# Altium PCB PCB1.PcbDoc (part 3 of 3)
Units mm, origin at the board's own origin, x right, y up, seen from the top; angles counter-clockwise.
Board outline 77.5 x 89.25 mm, 4 copper layers (Top Layer, Layer 1, Layer 2, Bottom Layer), stack 0.603 mm thick; 122 components, 112 nets, 561 pads, 302 vias.
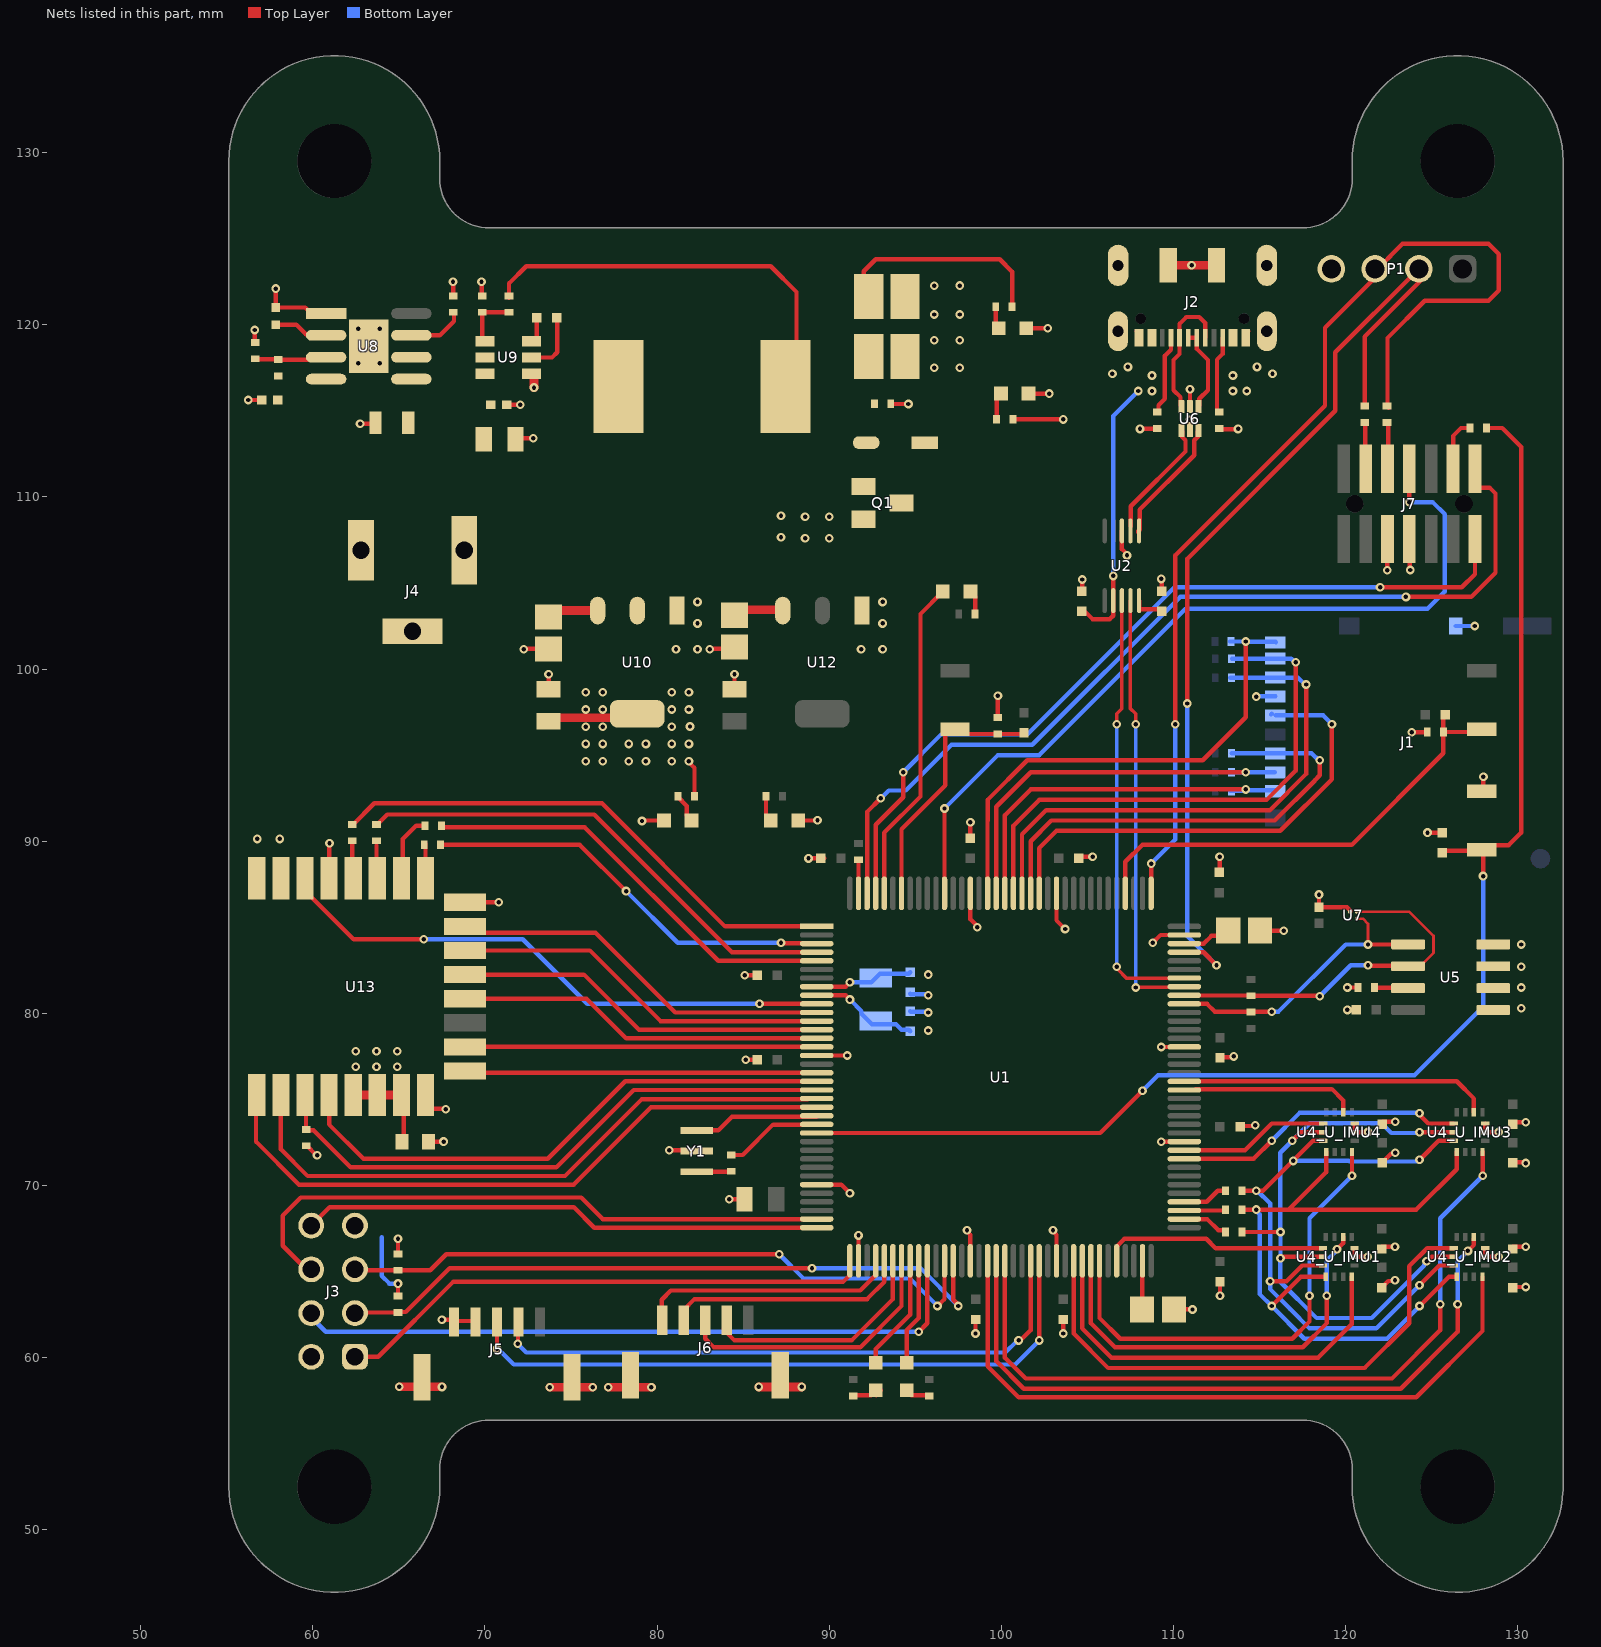
[diagram p4: the nets of this part, all layers, seen from the top]

## Via types
v1: diameter 0.508, hole 0.254, Top Layer to Bottom Layer, tented both sides, 302 vias

## Nets (pads, with @x,y where several pads share a name; then routed paths per layer and width w, separated by ;. In a path a pad name is that pad's centre, name@x,y a point inside that pad or via, vN(x,y) a via of type N, cw(c..) or ccw(c..) an arc to the next point about the centre after c; other vN are vias at no path point) (continued)
3V3_Wireless: C33.1 C42.1 J3.7 R21.1 R22.1 R30.2 R40.1 U10.2 U10.4 U13.5 U13.6 U13.7 | length 18.3
  Top Layer w0.254: R30.2@59.61,72.308 59.66,72.308 60.218,71.75 v1(60.25,71.75) ; R22.1@64.95,63.575 v1(64.95,64.3) ; R21.1@64.95,66.025 v1(64.95,66.9) ; U13.7@65.15,75.255 65.29,75.115 C33.1@65.29,72.55 ; U10.4@78.85,97.163 U10.4@78.85,97.4 ; v1(81.85,94.65) 81.85,94.581 82.175,94.256 R40.1@82.175,92.6
  Top Layer w0.5: U13.5@62.35,75.255 U13.6@63.75,75.255 U13.7@65.15,75.255 ; C42.1@74.35,97.163 U10.4@78.85,97.163
  Bottom Layer w0.254: 64,67 64,64.75 64.45,64.3 v1(64.95,64.3)
  other v1: 62.5,76.9 63.7,76.9 64.9,76.9 62.5,77.8 63.7,77.8 64.9,77.8 75.85,94.65 76.85,94.65 78.35,94.65 79.35,94.65 80.85,94.65 75.85,95.65 76.85,95.65 78.35,95.65 79.35,95.65 80.85,95.65 81.85,95.65 75.85,96.65 76.85,96.65 80.85,96.65 81.912,96.663 75.85,97.65 76.85,97.65 80.85,97.65 81.85,97.65 75.85,98.65 76.85,98.65 80.85,98.65 81.85,98.65
5V: C31.1 C41.1 D6.1 Q1.3 U10.3 U12.3 | length 4.5
  Top Layer w0.254: C41.1@74.35,103.4 C41.1@74.35,103.451
  Top Layer w0.5: C41.1@74.35,103.4 U10.3@76.55,103.4 ; C31.1@85.1,103.451 87.249,103.451 U12.3@87.3,103.4
5V_BUCK: C39.1 C40.1 D6.2 L1.2 Q1.1 R26.2 R28.2 R37.1 | length 37
  Top Layer w0.254: R26.2@71.4,121.577 71.4,122.4 72.4,123.4 86.6,123.4 88.1,121.9 88.1,117.05 L1.2@87.45,116.4 ; C40.1@92.05,121.65 92.005,121.695 92.005,123.105 92.7,123.8 99.9,123.8 100.625,123.075 R37.1@100.625,121.05
5V_USB: C22.1 J2.2 J2.11 Q1.2 R38.1 U2.7 U6.5 | length 19.6
  Top Layer w0.254: R38.1@100.675,114.5 v1(103.6,114.5) ; C22.1@104.677,103.474 104.717,103.474 105.291,102.9 106.3,102.9 106.5,103.1 U2.7@106.5,103.975 v1@106.5,105.4 ; U6.5@110.95,115.34 110.954,115.344 110.954,116.246 v1(110.958,116.25)
  Bottom Layer w0.254: v1(106.497,105.411) 106.497,114.697 v1(107.95,116.15)
  other v1: 88.6,107.6 90,107.6 87.2,107.655 88.6,108.845 90,108.845 87.2,108.9 108.75,116.15 113.45,116.15 114.25,116.15 108.75,117.05 113.45,117.05
+BATT: C35.1 J4.1 R23.2 U8.4
+BATT_PROTECT: C34.1 C37.1 C38.1 U8.5 U9.2 U9.3 | length 0
  Top Layer w0.254: U8.5@65.727,116.845 U8.5@65.742,116.83
BMI_CS1: U1.68 U4_U_IMU1.12 | length 13.2
  Top Layer w0.254: U1.68@106.7,65.625 106.7,66.454 107.146,66.9 111.9,66.9 112.444,66.356 U4_U_IMU1.12@118.686,66.356
BMI_CS2: U1.63 U4_U_IMU2.12 | length 32
  Top Layer w0.254: U1.63@104.2,65.625 104.2,61.4 106.2,59.4 121.1,59.4 123.7,62 123.7,65.318 124.737,66.356 U4_U_IMU2.12@126.286,66.356
BMI_CS3: U1.81 U4_U_IMU3.12 | length 17
  Top Layer w0.254: U1.81@110.625,71.55 114.65,71.55 v1(115.7,72.6) ; v1@124.2,74.2 124.8,73.6 U4_U_IMU3.12@126.286,73.6
  Bottom Layer w0.254: v1(115.7,72.6) 117.316,74.216 124.184,74.216 v1@124.2,74.2
  other v1: 124.291,74.2
BMI_CS4: U1.82 U4_U_IMU4.12 | length 8.7
  Top Layer w0.254: U1.82@110.625,72.05 114.15,72.05 115.7,73.6 U4_U_IMU4.12@118.7,73.6
BMI_INT11: U1.64 U4_U_IMU1.4 | length 23.8
  Top Layer w0.254: U1.64@104.7,65.625 104.7,61.7 106.4,60 118.4,60 120.35,61.95 U4_U_IMU1.4@120.35,64.7
BMI_INT12: U1.53 U4_U_IMU2.4 | length 40.4
  Top Layer w0.254: U1.53@99.2,65.625 99.2,59.5 101,57.7 124.1,57.7 127.95,61.55 U4_U_IMU2.4@127.95,64.7
BMI_INT13: U1.55 U4_U_IMU3.4 | length 44
  Top Layer w0.254: U1.55@100.2,65.625 100.2,60.004 101.412,58.792 122.692,58.792 125.5,61.6 v1@125.5,63.2 ; v1(127.969,70.571) U4_U_IMU3.4@127.969,71.951
  Bottom Layer w0.254: v1@125.5,63.2 125.5,68.102 v1(127.969,70.571)
  other v1: 125.5,63.1
BMI_INT14: U1.66 U4_U_IMU4.4 | length 27.3
  Top Layer w0.254: U1.66@105.7,65.625 105.7,62.3 106.9,61.1 116.9,61.1 117.9,62.1 v1(117.9,63.6) ; v1(120.364,70.564) U4_U_IMU4.4@120.364,71.944
  Bottom Layer w0.254: v1(117.9,63.6) 117.9,68.1 v1(120.364,70.564)
BMI_INT21: U1.65 U4_U_IMU1.9 | length 23.9
  Top Layer w0.254: U1.65@105.2,65.625 105.2,62 106.6,60.6 117.5,60.6 118.909,62.009 118.909,63.591 v1(118.9,63.6) ; v1(119.5,66.3) 119.85,66.65 U4_U_IMU1.9@119.85,67.011
  Bottom Layer w0.254: v1(118.9,63.6) 118.9,65.631 119.5,66.231 v1(119.5,66.3)
BMI_INT22: U1.54 U4_U_IMU2.9 | length 40.5
  Top Layer w0.254: U1.54@99.7,65.625 99.7,59.8 101.3,58.2 123.2,58.2 126.5,61.5 v1(126.5,63.1) ; v1(127.1,66.2) 127.45,66.55 U4_U_IMU2.9@127.45,66.911
  Bottom Layer w0.254: v1(126.5,63.1) 126.5,65.6 v1(127.1,66.2)
BMI_INT23: U1.90 U4_U_IMU3.9 | length 18
  Top Layer w0.254: U1.90@110.625,76.05 126.45,76.05 127.45,75.05 U4_U_IMU3.9@127.45,74.256
BMI_INT24: U1.89 U4_U_IMU4.9 | length 9.5
  Top Layer w0.254: U1.89@111.3,75.6 119.2,75.6 119.864,74.936 U4_U_IMU4.9@119.864,74.256
BMI_MISO: R34.1 U4_U_IMU1.1 U4_U_IMU2.1 U4_U_IMU3.1 U4_U_IMU4.1 | length 41.5
  Top Layer w0.254: R34.1@113.975,68.6 v1(114.8,68.6) 116.7,68.6 ; v1(115.7,63) 117.4,64.7 U4_U_IMU1.1@118.85,64.7 ; U4_U_IMU4.1@118.864,71.944 118.864,70.764 116.7,68.6 ; v1@124.3,63 126,64.7 U4_U_IMU2.1@126.45,64.7 ; U4_U_IMU3.1@126.45,71.944 126.45,70.95 124.1,68.6 116.7,68.6
  Bottom Layer w0.254: v1(114.8,68.6) 114.8,68.531 115,68.331 115,63.7 v1(115.7,63) 117.6,61.1 122.4,61.1 v1@124.3,63
  other v1: 124.291,63
BMI_MOSI: R35.1 U4_U_IMU1.14 U4_U_IMU2.14 U4_U_IMU3.14 U4_U_IMU4.14 | length 38.2
  Top Layer w0.254: R35.1@113.975,69.7 115.2,69.7 118.1,72.6 U4_U_IMU4.14@118.7,72.6 ; v1(115.61,64.434) 116.562,64.434 117.484,65.356 U4_U_IMU1.14@118.686,65.356 ; v1(124.291,64.209) 125.437,65.356 U4_U_IMU2.14@126.286,65.356 ; v1@124.443,71.643 125.4,72.6 U4_U_IMU3.14@126.286,72.6
  Bottom Layer w0.254: v1(114.8,69.7) 114.869,69.7 115.614,68.954 115.614,64.438 v1(115.61,64.434) 115.61,63.99 116.781,62.819 117.9,61.7 121.782,61.7 v1(124.291,64.209) ; v1(116.956,71.429) 120.173,71.429 120.21,71.392 124.114,71.392 124.222,71.5 v1(124.291,71.5)
BMI_SCK: R29.1 U4_U_IMU1.13 U4_U_IMU2.13 U4_U_IMU3.13 U4_U_IMU4.13 | length 37.8
  Top Layer w0.254: R29.1@113.975,67.3 v1(116.211,67.3) ; v1(116.211,65.775) 116.28,65.775 116.36,65.856 U4_U_IMU1.13@118.686,65.856 ; v1(116.9,72.6) 117.4,73.1 U4_U_IMU4.13@118.7,73.1 ; v1@124.2,73.1 U4_U_IMU3.13@126.286,73.1 ; v1(124.7,65.6) 124.72,65.6 124.976,65.856 U4_U_IMU2.13@126.286,65.856
  Bottom Layer w0.254: v1@116.2,67.3 116.2,71.9 v1(116.9,72.6) 117.916,73.616 122.084,73.616 122.649,73.051 124.173,73.051 124.2,73.078 v1@124.2,73.1 ; v1(116.211,67.3) v1(116.211,65.775) 116.2,65.764 116.2,64.414 118.31,62.304 121.512,62.304 124.573,65.365 124.573,65.404 124.7,65.531 v1(124.7,65.6)
  other v1: 124.291,73.1
BOOT0: C18.1 R5.2 SW3.1 U1.138 | length 15
  Top Layer w0.254: U1.138@94.2,86.975 94.2,90.7 96.75,93.25 96.75,96.227 97.023,96.5 SW3.1@97.3,96.5 97.573,96.227 C18.1@101.2,96.227
BUCK_SW: C36.2 L1.1 U9.5 | length 3.6
  Top Layer w0.254: U9.5@72.7,118.1 73.9,118.1 74.2,118.4 C36.2@74.2,120.421
CC1: J2.3 R16.1 | length 4.5
  Top Layer w0.254: R16.1@112.65,114.925 112.6,114.925 112.527,114.998 112.527,117.977 112.85,118.3 J2.3@112.85,119.25
CC2: J2.9 R15.1 | length 4.7
  Top Layer w0.254: R15.1@109.05,114.925 109.055,114.925 109.128,114.998 109.128,115.328 109.5,115.7 109.5,118.2 109.85,118.55 J2.9@109.85,119.25
dVdt: C30.1 U8.2 | length 3.3
  Top Layer w0.254: C30.1@57.749,120 59.05,120 59.595,119.455 60.703,119.455 U8.2@60.773,119.385
DWM_CS: R1.1 U1.3 | length 24
  Top Layer w0.254: 67.675,89.8 75.5,89.8 v1(78.2,87.1) ; v1(87.2,84.1) 87.239,84.061 89.259,84.061 U1.3@89.271,84.05 ; U1.3@89.526,84.054 U1.3@89.53,84.05
  Bottom Layer w0.254: v1(78.2,87.1) 81.2,84.1 v1(87.2,84.1)
DWM_EXTON: U1.22 U13.1 | length 38.2
  Top Layer w0.254: U13.1@56.75,75.255 56.7,75.205 56.7,72.55 59.2,70.05 75.15,70.05 79.65,74.55 U1.22@89.275,74.55
DWM_IRQ: U1.10 U13.22 | length 33.4
  Top Layer w0.254: U13.22@59.55,87.845 59.55,87.12 62.37,84.3 v1(66.45,84.3) ; v1(85.95,80.558) 85.954,80.554 89.526,80.554 U1.10@89.53,80.55
  Bottom Layer w0.254: v1(66.45,84.3) 72.2,84.3 75.942,80.558 v1(85.95,80.558)
DWM_MISO: R32.1 U1.4 | length 28.7
  Top Layer w0.254: R32.1@63.7,90.975 63.75,90.975 64.325,91.55 76.35,91.55 84.35,83.55 U1.4@88.8,83.55
DWM_MOSI: R33.1 U1.5 | length 24.4
  Top Layer w0.254: R33.1@67.475,90.8 75.8,90.8 83.55,83.05 U1.5@88.7,83.05
DWM_nRST: R30.1 U1.20 U13.3 | length 34
  Top Layer w0.254: U13.3@59.55,75.255 59.61,75.195 R30.1@59.61,73.258 59.66,73.209 60.041,73.209 62.2,71.05 74.15,71.05 78.65,75.55 U1.20@88.8,75.55
DWM_RXLED: U1.13 U13.13 | length 21.3
  Top Layer w0.254: U13.13@68.845,82.25 75.75,82.25 78.95,79.05 U1.13@88.8,79.05
DWM_RXOKLED: U1.11 U13.15 | length 21.9
  Top Layer w0.254: U13.15@68.845,85.05 69.218,84.677 76.423,84.677 81.05,80.05 U1.11@88.7,80.05
DWM_SCK: R31.1 U1.1 | length 30.4
  Top Layer w0.254: R31.1@62.3,90.975 62.35,90.975 63.575,92.2 76.8,92.2 83.95,85.05 U1.1@89.275,85.05
DWM_SFDLED: U1.12 U13.14 | length 21.7
  Top Layer w0.254: U13.14@68.845,83.65 76.1,83.65 80.2,79.55 U1.12@88.8,79.55
DWM_SPIPHA: U1.18 U13.9 | length 20
  Top Layer w0.254: U13.9@68.845,76.65 68.945,76.55 U1.18@88.8,76.55
DWM_SPIPOL: U1.15 U13.10 | length 20.4
  Top Layer w0.254: U13.10@68.845,78.05 U1.15@89.275,78.05
DWM_SYNC: U1.19 U13.4 | length 32.7
  Top Layer w0.254: U13.4@60.95,75.255 60.95,73.55 62.95,71.55 73.65,71.55 78.15,76.05 U1.19@89.275,76.05
DWM_TXLED: U1.14 U13.12 | length 21
  Top Layer w0.254: U13.12@68.845,80.85 75.9,80.85 78.2,78.55 U1.14@88.9,78.55
DWM_WAKEUP: U1.21 U13.2 | length 36.2
  Top Layer w0.254: U13.2@58.15,75.255 58.15,72.1 59.7,70.55 74.65,70.55 79.1,75 U1.21@88.743,75
EEPROM_SCL: R7.2 U1.100 U5.6 U7.A2 | length 21.6
  Top Layer w0.152: U7.A2@120.65,85.9 123.7,85.9 125.1,84.5 125.1,83.51 124.325,82.735 U5.6@123.625,82.735
  Top Layer w0.254: U1.100@110.625,81.05 110.637,81.039 114.5,81.039 114.526,81.012 118.487,81.012 v1(118.5,81) ; v1(121.3,82.8) 121.333,82.767 123.593,82.767 U5.6@123.625,82.735
  Bottom Layer w0.254: v1(118.5,81) 120.3,82.8 v1(121.3,82.8)
EEPROM_SDA: R8.2 U1.99 U5.5 U7.B2 | length 16.8
  Top Layer w0.152: U7.B2@120.65,85.5 121,85.5 121.3,85.2 v1(121.3,84)
  Top Layer w0.254: U1.99@110.625,80.55 111.95,80.55 112.4,80.1 R8.2@114.5,80.1 ; R8.2@114.5,80.075 114.512,80.088 115.688,80.088 v1(115.7,80.1) ; v1(121.3,84) 121.303,84.002 123.623,84.002 U5.5@123.625,84.005
  Bottom Layer w0.254: v1(115.7,80.1) 116.1,80.1 120,84 v1(121.3,84)
EN: R23.1 R25.2 U8.3 | length 4.1
  Top Layer w0.254: R25.2@56.75,118.025 56.775,118 58.025,118 58.05,117.975 59.668,117.975 59.808,118.115 U8.3@60.773,118.115
ESP_CH_PD: J3.3 R22.2 U1.49 | length 39.8
  Top Layer w0.254: J3.3@62.45,62.557 J3.3@63.1,62.557 ; J3.3@63.1,62.625 63.2,62.625 R22.2@64.95,62.625 64.978,62.653 65.403,62.653 67.95,65.2 v1(89,65.2) ; U1.49@97.2,65.625 97.2,63.369 97.5,63.069 v1(97.5,63)
  Bottom Layer w0.254: v1(89,65.2) 95.3,65.2 v1(97.5,63)
ESP_IO0: J3.6 U1.35 | length 36
  Top Layer w0.254: J3.6@59.91,65.13 59.62,65.13 58.25,66.5 58.25,68.25 59.3,69.3 75.6,69.3 76.85,68.05 U1.35@89.275,68.05
ESP_IO2: J3.4 U1.46 | length 40.2
  Top Layer w0.254: v1(95.208,61.5) 95.7,61.992 U1.46@95.7,65.625
  Bottom Layer w0.254: J3.4@59.73,62.52 60.75,61.5 v1(95.208,61.5)
ESP_nRST: J3.5 R21.2 U1.48 | length 38.3
  Top Layer w0.254: J3.5@62.45,65.103 63.173,65.103 63.2,65.075 R21.2@64.95,65.075 66.825,65.075 67.75,66 v1(87.1,66) ; v1@96.3,63 96.7,63.4 U1.48@96.7,65.625
  Bottom Layer w0.254: v1(87.1,66) 88.5,64.6 94.688,64.6 v1(96.286,63.002)
ESP_RXD: J3.8 U1.36 | length 30.6
  Top Layer w0.254: J3.8@59.698,67.458 60.987,68.747 75.153,68.747 76.35,67.55 U1.36@89.275,67.55
ESP_TXD: J3.1 U1.37 | length 31.5
  Top Layer w0.254: J3.1@62.45,60.05 63.8,60.05 68.15,64.4 90.8,64.4 91.2,64.8 U1.37@91.2,65.625
EXT_CS: J6.1 U1.40 | length 15.2
  Top Layer w0.254: J6.1@80.453,62.378 80.3,62.225 80.268,62.257 80.268,63.368 80.8,63.9 91.735,63.9 ; 91.805,63.9 92.7,64.795 U1.40@92.7,65.625
EXT_MISO: J6.4 U1.42 | length 13.3
  Top Layer w0.254: J6.4@83.858,61.642 84.5,61 91.3,61 93.7,63.4 U1.42@93.7,65.625
EXT_MOSI: J6.3 U1.43 | length 16.4
  Top Layer w0.254: J6.3@82.8,62.225 82.8,61.1 83.304,60.596 91.796,60.596 94.2,63 U1.43@94.2,65.625
EXT_RX: J5.3 U1.59 | length 38.7
  Top Layer w0.254: v1(70.7,60.5) J5.3@70.7,62.125 ; v1(102.2,61) U1.59@102.2,65.625
  Bottom Layer w0.254: v1(70.7,60.5) 70.769,60.5 71.669,59.6 100.8,59.6 v1(102.2,61)
EXT_SCK: J6.2 U1.41 | length 14.1
  Top Layer w0.254: J6.2@81.55,62.225 81.55,62.775 82.175,63.4 92.2,63.4 93.2,64.4 U1.41@93.2,65.625
EXT_TX: J5.4 U1.58 | length 36
  Top Layer w0.254: v1(71.9,60.8) 71.925,60.825 71.925,62.1 J5.4@71.95,62.125 ; v1@101,60.9 101.7,61.6 U1.58@101.7,65.625
  Bottom Layer w0.254: v1(71.9,60.8) 72.4,60.3 100.231,60.3 100.931,61 v1(101,61)
FB: R26.1 R27.1 U9.1 | length 2.9
  Top Layer w0.254: R27.1@69.85,120.6 69.85,119.2 U9.1@70,119.05 ; R27.1@69.85,120.725 71.106,120.725
GND: C1.2 C2.2 C3.2 C4.2 C5.2 C6.2 C7.2 C8.2 C9.2 C10.2 C11.2 C12.2 C13.2 C14.2 C15.2 C16.1 C19.1 C20.2 C21.2 C22.2 C27_U_IMU1.2 C27_U_IMU2.2 C27_U_IMU3.2 C27_U_IMU4.2 C28_U_IMU1.2 C28_U_IMU2.2 C28_U_IMU3.2 C28_U_IMU4.2 C29.2 C30.2 C31.2 C32.2 C33.2 C34.2 C35.2 C37.2 C38.2 C39.2 C40.2 C41.2 C42.2 D2.1 D3.1 D4.1 D5.1 J1.6 J1.10 J2.1 J2.12 J2.S1 J2.S2 J2.S3 J2.S4 J2.S5 J2.S6 J3.2 J4.2 J4.3 J5.1 J5.2 J5.6 J5.7 J6.6 J6.7 J7.5 J7.7 P1.4 R4.1 R5.1 R14.2 R15.2 R16.2 R24.1 R25.1 R27.2 R28.1 SW1.2 U1.16 U1.31 U1.38 U1.51 U1.61 U1.83 U1.94 U1.107 U1.120 U1.130 U2.3 U4_U_IMU1.6 U4_U_IMU1.7 U4_U_IMU2.6 U4_U_IMU2.7 U4_U_IMU3.6 U4_U_IMU3.7 U4_U_IMU4.6 U4_U_IMU4.7 U5.1 U5.2 U5.3 U5.4 U6.2 U7.A1 U8.1 U8.9 U9.4 U10.1 U12.1 U13.8 U13.16 U13.21 U13.23 U13.24 Y1.2 | length 107.5
  Top Layer w0.254: v1(56.25,115.63) C35.2@57.04,115.63 ; R25.1@56.623,118.919 v1(56.623,119.694) ; C30.2@57.85,120.96 v1(57.85,122.1) ; C30.2@57.85,121 59.563,121 59.908,120.655 U8.1@60.773,120.655 ; U13.21@60.95,87.845 v1@60.95,89.9 ; v1(62.75,114.25) 63.595,114.25 C34.2@63.647,114.302 ; U13.8@66.55,75.255 66.55,74.823 66.923,74.45 v1@67.7,74.45 ; C33.2@66.61,72.55 v1(67.6,72.55) ; v1(67.5,62.2) 68.125,62.2 68.2,62.125 J5.2@69.45,62.125 ; 68.147,122.199 68.157,122.189 ; R24.1@68.157,121.637 v1@68.157,122.489 ; U13.16@68.845,86.45 v1(70.8,86.45) ; R27.2@69.825,121.65 v1@69.825,122.475 ; C38.2@71.51,115.35 v1(72.05,115.35) ; C37.2@71.56,113.4 v1(72.8,113.4) ; C37.2@71.71,113.85 C37.2@71.76,113.9 ; v1@72.226,101.174 C41.2@73.7,101.174 ; C42.2@73.7,98.825 v1(73.7,99.7) ; v1@79.1,91.2 D5.1@80.4,91.2 ; v1(80.7,72.05) 82.25,72.05 Y1.2@82.3,72 ; v1@83.026,101.174 C31.2@84.5,101.174 ; v1(84.2,69.2) C1.2@84.736,69.2 ; C32.2@84.5,98.825 v1(84.5,99.7) ; v1@85.104,82.204 C8.2@85.812,82.204 ; v1(85.15,77.3) C9.2@85.816,77.3 ; C8.2@85.9,82.308 C8.2@85.904,82.304 ; D4.1@88.2,91.2 v1@89.3,91.2 ; v1(88.8,89) C7.2@89.716,89 ; U1.16@89.53,77.55 v1(91.05,77.55) ; U1.31@89.752,70.052 90.698,70.052 v1(91.2,69.55) ; U1.38@91.7,65.625 v1(91.7,67.1) ; R28.1@93.575,115.4 v1@94.35,115.4 ; v1(98,67.4) 98,67.331 98.2,67.131 U1.51@98.2,65.625 ; U1.130@98.2,86.933 98.2,85.469 98.6,85.069 v1(98.6,85) ; C6.2@98.2,90.284 v1(98.2,91.1) ; v1(98.5,61.4) C12.2@98.5,62.216 ; R5.1@99.8,97.175 99.8,97.6 v1@99.8,98.2 ; D2.1@101.45,119.8 v1(102.7,119.8) ; D3.1@101.575,116 v1(102.775,116) ; v1(103,67.4) 103,67.331 103.2,67.131 U1.61@103.2,65.625 ; U1.120@103.2,86.956 103.2,85.4 v1(103.7,84.9) ; v1(103.6,61.4) C11.2@103.6,62.216 ; C5.2@104.342,88.964 104.342,89.094 C5.2@104.348,89.1 ; C5.2@104.648,89.1 v1(105.3,89.1) ; C22.2@104.688,104.406 104.688,105.188 v1(104.7,105.2) ; J2.S4@106.78,119.625 J2.S4@106.782,119.623 ; U2.3@107,108.025 107.002,108.023 107.002,106.967 107.3,106.669 v1(107.3,106.6) ; J2.12@107.867,119.623 108,119.49 J2.12@108,119.25 ; v1(108.05,113.95) 108.063,113.962 109.038,113.962 R15.2@109.05,113.975 ; v1(108.8,84.1) 109.25,84.55 U1.107@110.625,84.55 ; v1(109.283,72.549) U1.83@110.803,72.549 ; v1(109.283,78.043) U1.94@110.803,78.043 ; C21.2@109.284,104.441 109.309,104.466 109.309,105.218 v1(109.292,105.235) ; C13.2@110.308,62.808 v1@111.092,62.808 ; U6.2@110.95,113.86 v1(110.95,114.484) ; C4.2@112.675,88.209 v1(112.675,89.1) ; v1@112.698,63.546 C10.2@112.698,64.462 ; R16.2@112.763,113.937 v1@113.738,113.937 ; C3.2@112.816,77.44 112.834,77.458 113.458,77.458 v1(113.5,77.5) ; C2.2@114.084,73.458 114.708,73.458 v1(114.75,73.5) ; J2.1@114.2,119.25 114.2,119.49 J2.1@114.333,119.623 ; J2.S3@115.418,119.623 J2.S3@115.42,119.625 ; C14.2@115.526,84.4 115.526,84.724 115.602,84.8 v1(116.4,84.8) ; v1(118.45,86.9) 118.45,86.16 120.076,86.16 U7.A1@120.293,85.943 ; v1(120.1,80.2) C20.2@120.74,80.2 ; v1(120.1,81.5) R14.2@120.725,81.5 ; U4_U_IMU1.7@120.514,66.356 U4_U_IMU1.6@120.514,65.856 121.278,65.856 v1(121.286,65.864) ; U4_U_IMU4.7@120.529,73.6 U4_U_IMU4.6@120.529,73.1 121.292,73.1 v1(121.3,73.108) ; C27_U_IMU1.2@122.02,66.356 122.1,66.436 v1(122.866,66.436) ; C28_U_IMU1.2@122.061,63.933 122.061,64.033 122.48,64.451 122.851,64.451 v1@122.9,64.5 ; C28_U_IMU4.2@122.114,71.316 122.65,71.851 v1@122.88,71.851 ; C27_U_IMU4.2@122.114,73.68 122.128,73.694 122.866,73.694 v1(122.88,73.708) ; v1(122.415,105.745) 122.423,105.753 122.423,107.542 J7.5@122.415,107.55 ; J7.7@123.7,107.565 123.725,107.54 123.725,105.775 v1(123.75,105.75) ; v1(123.835,96.335) R4.1@124.713,96.335 ; v1(124.75,90.5) 124.758,90.492 125.472,90.492 125.549,90.416 C15.2@125.549,90.409 ; SW1.2@128,92.9 v1(128,93.75) ; U4_U_IMU2.7@128.115,66.356 U4_U_IMU2.6@128.115,65.856 128.878,65.856 v1(128.886,65.864) ; U4_U_IMU3.7@128.115,73.6 U4_U_IMU3.6@128.115,73.1 128.878,73.1 v1(128.886,73.108) ; C27_U_IMU2.2@129.62,66.356 129.7,66.436 v1(130.466,66.436) ; C27_U_IMU3.2@129.62,73.6 129.7,73.68 v1(130.466,73.68) ; C28_U_IMU2.2@129.915,64.1 v1@130.5,64.1 ; 129.992,71.349 130.451,71.349 v1@130.5,71.3
  Top Layer w0.508: v1(65.023,58.304) v1@67.523,58.304 ; U9.4@72.7,117.15 72.804,117.15 72.85,117.104 v1(72.85,116.35) ; v1(73.77,58.275) v1(76.27,58.275) ; v1(77.17,58.275) v1(79.67,58.275) ; v1(85.9,58.3) v1(88.4,58.3) ; J2.S2@109.7,123.45 v1(111.05,123.45) J2.S1@112.5,123.45
  Bottom Layer w0.254: C19.1@94.697,80.131 94.735,80.092 95.658,80.092 v1@95.7,80.05 ; C16.1@94.697,81.131 94.729,81.099 95.651,81.099 v1@95.7,81.05 ; v1(114.8,98.4) 114.813,98.413 115.912,98.413 J1.6@115.925,98.425 ; J1.10@126.4,102.5 v1(127.5,102.5)
  other v1: 67.51,58.3 111.1,62.8 112.7,63.6 130.466,64.1 122.866,64.5 130.466,71.3 122.88,71.9 67.72,74.434 95.75,79 95.75,80.05 130.2,80.3 95.75,81.05 130.2,81.5 85.1,82.208 95.75,82.25 130.2,82.7 130.2,84 60.97,89.884 56.776,90.132 58.076,90.132 79.124,91.176 89.32,91.215 99.8,98.447 72.259,101.149 81.1,101.15 82.35,101.15 83.059,101.149 91.85,101.15 93.1,101.15 82.35,102.65 93.1,102.65 82.35,103.9 93.1,103.9 113.75,113.95 94.6,115.4 106.45,117.15 115.75,117.15 96.1,117.5 97.581,117.503 107.35,117.55 114.85,117.55 62.641,117.764 63.891,117.764 96.1,119.094 97.581,119.097 62.641,119.764 63.891,119.764 96.1,120.594 97.581,120.597 96.1,122.27 97.581,122.273 68.147,122.499 69.8,122.5
ILM: R24.2 U8.7 | length 3.3
  Top Layer w0.254: U8.7@65.727,119.385 67.385,119.385 68.2,120.2 R24.2@68.2,120.713
LED_Blue1: D1.1 U1.44 | length 6.8
  Top Layer w0.254: D1.1@92.7,59.7 92.7,60.5 94.7,62.5 U1.44@94.7,65.625
LED_Blue2: D7.1 U1.45 | length 6.2
  Top Layer w0.254: D7.1@94.5,59.7 94.5,61.6 95.2,62.3 U1.45@95.2,65.625
LED_Blue3: D8.1 U1.140 | length 18.9
  Top Layer w0.254: U1.140@93.2,86.975 93.2,90.5 95.3,92.6 95.3,103.2 D8.1@96.6,104.5
NetC21_1: C21.1 U2.10 | length 1.8
  Top Layer w0.254: U2.10@108,103.975 108,103.476 108.002,103.474 C21.1@109.327,103.474
NetC36_1: C36.1 U9.6 | length 1.7
  Top Layer w0.254: U9.6@72.7,119.05 73.016,119.05 C36.1@73.016,120.4
NetD1_2: D1.2 R36.1 | length 1.4
  Top Layer w0.254: R36.1@91.4,57.825 D1.2@92.425,57.825 ; D1.2@92.725,57.825 D1.2@93,58.1
NetD2_2: D2.2 R37.2 | length 1.3
  Top Layer w0.254: R37.2@99.675,121.05 99.675,119.975 D2.2@99.85,119.8
NetD3_2: D3.2 R38.2 | length 1.6
  Top Layer w0.254: R38.2@99.725,114.5 99.725,115.75 D3.2@99.975,116
NetD4_2: D4.2 R39.2 | length 1.5
  Top Layer w0.254: R39.2@86.325,92.6 86.325,91.475 D4.2@86.6,91.2
NetD5_2: D5.2 R40.2 | length 1.7
  Top Layer w0.254: R40.2@81.225,92.6 81.225,92.55 81.727,92.048 81.727,91.473 D5.2@82,91.2
NetD7_2: D7.2 R20.1 | length 1.4
  Top Layer w0.254: D7.2@94.5,58.1 94.775,57.825 R20.1@95.8,57.825
NetD8_2: D8.2 R41.1 | length 1.4
  Top Layer w0.254: D8.2@98.2,104.5 98.475,104.225 R41.1@98.475,103.2
NetJ2_5: J2.5 J2.8 U6.6 | length 7.8
  Top Layer w0.254: U6.6@110.45,115.24 110.402,115.288 110.402,115.798 110,116.2 110,117.95 110.35,118.3 J2.8@110.35,119.25 110.35,120.05 110.75,120.45 111.5,120.45 111.85,120.1 J2.5@111.85,119.25
NetJ2_6: J2.6 J2.7 U6.4 | length 5
  Top Layer w0.254: J2.7@110.85,119.25 J2.6@111.35,119.25 111.358,119.242 111.358,118.592 112,117.95 112,116.2 111.498,115.698 111.498,115.288 U6.4@111.45,115.24
NetJ7_4: J7.4 R17.1 | length 2.7
  Top Layer w0.254: R17.1@121.1,114.325 121.13,114.295 121.13,111.665 J7.4@121.16,111.635
NetJ7_6: J7.6 R18.1 | length 2.6
  Top Layer w0.254: J7.6@122.43,111.635 122.465,111.67 122.465,114.19 R18.1@122.5,114.225
NetJ7_12: J7.12 R19.1 | length 3.1
  Top Layer w0.254: J7.12@126.24,111.635 126.24,113.54 126.7,114 R19.1@127.225,114
NetR1_2: R1.2 U13.17 | length 2
  Top Layer w0.254: R1.2@66.548,89.883 66.548,89.677 66.55,89.675 U13.17@66.55,87.845
NetR2_2: R2.2 U1.143 | length 1.9
  Top Layer w0.254: U1.143@91.7,86.975 91.7,88.55 R2.2@91.7,88.925
NetR3_1: R3.1 Y1.1 | length 2
  Top Layer w0.254: Y1.1@82.3,70.8 R3.1@84.3,70.8
NetR14_1: R14.1 U5.7 | length 2
  Top Layer w0.254: R14.1@121.693,81.482 U5.7@123.608,81.482 ; 122.475,81.5 122.493,81.482 ; U5.7@124.408,81.482 U5.7@124.425,81.465
NetR29_2: R29.2 U1.74 | length 2.7
  Top Layer w0.254: U1.74@110.625,68.05 111.95,68.05 112.593,67.407 113.018,67.407 R29.2@113.025,67.4
NetR31_2: R31.2 U13.20 | length 2
  Top Layer w0.254: R31.2@62.3,89.825 62.3,87.895 U13.20@62.35,87.845
NetR32_2: R32.2 U13.19 | length 1.9
  Top Layer w0.254: 63.7,89.763 63.7,87.895 U13.19@63.75,87.845
NetR33_2: R33.2 U13.18 | length 3.9
  Top Layer w0.254: U13.18@65.15,87.845 65.225,87.92 65.225,90.125 66,90.9 R33.2@66.525,90.9
NetR34_2: R34.2 U1.75 | length 2.4
  Top Layer w0.254: U1.75@110.625,68.55 R34.2@113.012,68.55
NetR35_2: R35.2 U1.76 | length 2.7
  Top Layer w0.254: U1.76@110.625,69.05 111.925,69.05 112.575,69.7 R35.2@113.025,69.7
nFLT: U8.6
nRST: C15.1 R19.2 SW1.1 U1.25 | length 80.8
  Top Layer w0.254: U1.25@89.275,73.05 105.75,73.05 v1(108.2,75.5) ; C15.1@125.5,89.44 127.94,89.44 128.273,89.773 129.473,89.773 130.2,90.5 130.2,112.9 129.1,114 R19.2@128.175,114 ; v1@128,88 SW1.1@128,89.44
  Bottom Layer w0.254: v1(108.2,75.5) 109.1,76.4 124,76.4 127.982,80.382 v1(127.982,87.974)
OSC32_IN: C16.2 U1.8 Y2.2 | length 5.5
  Top Layer w0.254: U1.8@89.53,81.55 90.95,81.55 v1(91.2,81.8)
  Bottom Layer w0.254: v1@91.216,81.8 92.45,81.8 92.952,82.302 94.617,82.302 C16.2@94.7,82.384
OSC32_OUT: C19.2 U1.9 Y2.1 | length 6.1
  Top Layer w0.254: U1.9@89.53,81.05 90.95,81.05 v1(91.2,80.8)
  Bottom Layer w0.254: v1(91.2,80.8) 91.877,80.123 91.877,79.973 92.482,79.368 93.882,79.368 94.202,79.048 94.617,79.048 C19.2@94.7,78.966
OSC_IN: U1.23 Y1.3 | length 7.6
  Top Layer w0.254: Y1.3@82.3,73.2 83.55,73.2 84.35,74 U1.23@89.275,74 ; U1.23@89.275,74.05 U1.23@89.53,74.05
OSC_OUT: R3.2 U1.24 | length 6
  Top Layer w0.254: R3.2@84.3,71.775 84.975,71.775 86.739,73.539 89.519,73.539 U1.24@89.53,73.55
SD_CD: J1.9 R6.1 U1.128 | length 29.5
  Top Layer w0.254: 99.196,91.2 99.196,86.979 U1.128@99.2,86.975 ; 99.2,91.2 99.2,92.4 101.5,94.7 111.7,94.7 114.2,97.2 v1(114.2,101.6)
  Bottom Layer w0.254: R6.1@113.28,101.6 v1(114.2,101.6) 114.225,101.575 115.925,101.575 J1.9@115.952,101.548
SD_CLK: J1.5 U1.122 | length 28
  Top Layer w0.254: U1.122@102.2,86.975 102.2,89.6 103.2,90.6 116.2,90.6 119.2,93.6 v1(119.2,96.8)
  Bottom Layer w0.254: J1.5@115.662,97.363 J1.5@115.7,97.4 ; J1.5@115.938,97.313 118.687,97.313 v1(119.2,96.8)
SD_CMD: J1.3 R9.1 U1.123 | length 27.6
  Top Layer w0.254: U1.123@101.7,86.975 101.7,90 102.9,91.2 115.883,91.2 118.2,93.517 118.2,93.532 118.5,93.832 v1(118.5,94.7)
  Bottom Layer w0.254: R9.1@113.375,95.112 115.912,95.112 115.925,95.125 115.938,95.113 118.019,95.113 118.431,94.7 v1(118.5,94.7)
SD_D0: J1.7 R10.1 U1.124 | length 31.1
  Top Layer w0.254: U1.124@101.2,86.975 101.2,90.4 102.6,91.8 115.6,91.8 117.7,93.9 v1(117.7,99.1)
  Bottom Layer w0.254: R10.1@113.3,99.5 R10.1@113.375,99.5 J1.7@115.887,99.5 ; J1.7@115.9,99.5 117.231,99.5 117.631,99.1 v1(117.7,99.1)
SD_D1: J1.8 R11.1 U1.125 | length 31.7
  Top Layer w0.254: U1.125@100.7,86.975 100.7,90.9 102.2,92.4 115.4,92.4 117.1,94.1 v1(117.1,100.4)
  Bottom Layer w0.254: R11.1@113.4,100.6 116.834,100.6 117.034,100.4 v1(117.1,100.4)
SD_D2: J1.1 R12.1 U1.126 | length 21.8
  Top Layer w0.254: U1.126@100.2,86.975 100.204,86.979 100.204,89.052 100.208,89.056 ; 100.2,89.052 100.2,91.5 101.708,93.008 v1(114.2,93.008)
  Bottom Layer w0.254: R12.1@113.302,92.913 114.036,92.913 114.131,93.008 v1(114.2,93.008) ; v1@114.2,93 114.238,92.963 J1.1@115.923,92.963
SD_D3: J1.2 R13.1 U1.127 | length 22.9
  Top Layer w0.254: U1.127@99.7,86.975 99.7,92 101.7,94 v1(114.2,94)
  Bottom Layer w0.254: R13.1@113.302,94 v1(114.2,94) 114.213,94.013 J1.2@115.873,94.013
SW: C17.2 R4.2 SW2.2 U1.112 | length 27.4
  Top Layer w0.254: U1.112@107.2,86.975 107.2,88.8 108.2,89.8 120.362,89.8 125.675,95.113 R4.2@125.675,96.346 ; C17.2@125.675,97.331 125.675,96.5 R4.2@125.675,96.346 ; SW2.2@127.9,96.5 127.746,96.346 R4.2@125.675,96.346
SWCLK: P1.3 R18.2 U1.109 | length 63.4
  Top Layer w0.254: U1.109@108.7,86.975 v1(108.7,88.7) ; v1(110.1,96.8) 110.1,106.6 118.8,115.3 118.8,119.82 122.23,123.25 122.23,123.614 122.621,124.005 122.621,124.021 123.3,124.7 128.3,124.7 128.9,124.1 128.9,122 128.3,121.4 124.6,121.4 122.43,119.23 122.43,115.245 R18.2@122.5,115.175
  Bottom Layer w0.254: v1(108.7,88.7) 110.1,90.1 v1(110.1,96.8)
SWDIO: P1.2 R17.2 U1.105 | length 58.9
  Top Layer w0.254: U1.105@110.625,83.55 111.75,83.55 v1(112.5,82.8) ; v1(110.8,98) 110.8,106.4 119.4,115 119.4,118.4 123.992,122.992 124.512,122.992 124.77,123.25 124.77,122.97 121.1,119.3 R17.2@121.1,115.275
  Bottom Layer w0.254: v1(110.8,98) 110.8,84.5 v1(112.5,82.8)
SWO: J7.8 U1.133 | length 47.4
  Top Layer w0.254: U1.133@96.7,87.5 v1(96.7,91.9) ; v1(123.7,109.7) J7.8@123.7,111.635
  Bottom Layer w0.254: v1(96.7,91.9) 99.8,95 102.2,95 110.7,103.5 124.75,103.5 125.75,104.5 125.75,109 125.05,109.7 v1(123.7,109.7)
T_VCP_RX: J7.13 U1.141 | length 47.7
  Top Layer w0.254: U1.141@92.7,86.975 92.7,90.95 94.3,92.55 v1(94.3,94) ; v1(122,104.75) 126.75,104.75 127.51,105.51 J7.13@127.51,107.565
  Bottom Layer w0.254: v1(94.3,94) 96.5,96.2 101.5,96.2 110.058,104.758 121.992,104.758 v1(122,104.75)
T_VCP_TX: J7.14 U1.142 | length 53
  Top Layer w0.254: U1.142@92.2,86.975 92.2,91.7 v1(93,92.5) ; v1(123.5,104.192) 127.292,104.192 128.7,105.6 128.7,110.2 128.377,110.523 127.778,110.523 J7.14@127.51,110.792
  Bottom Layer w0.254: v1(93,92.5) 93.009,92.5 93.454,92.944 94.444,92.944 97.1,95.6 101.8,95.6 110.392,104.192 v1(123.5,104.192)
USART1_RX: U1.102 U2.8 | length 25.7
  Top Layer w0.203: v1(106.7,82.7) 106.7,82.618 107.046,82.272 107.046,82.254 107.25,82.05 U1.102@110.625,82.05 ; v1(106.7,96.8) 106.7,97.4 107,97.7 U2.8@107,103.975
  Bottom Layer w0.203: v1(106.7,82.7) v1(106.7,96.8)
USART1_TX: U1.101 U2.9 | length 25.4
  Top Layer w0.203: U2.9@107.5,103.975 107.5,97.7 107.8,97.4 v1(107.8,96.8) ; v1(107.8,81.5) 107.829,81.529 110.605,81.529 U1.101@110.625,81.55
  Bottom Layer w0.203: v1(107.8,81.5) v1(107.8,96.8)
USB_N: U2.2 U6.1 | length 7
  Top Layer w0.254: U2.2@107.522,108.3 107.522,109.46 110.696,112.634 110.696,113.285 110.498,113.483 110.498,113.812 U6.1@110.45,113.86
USB_P: U2.1 U6.3 | length 7.4
  Top Layer w0.254: U2.1@107.959,107.941 107.959,108.019 108.03,108.09 108.03,109.249 111.204,112.423 111.204,113.285 111.402,113.483 111.402,113.812 U6.3@111.45,113.86
VCAP_1: C13.1 U1.71 | length 2.2
  Top Layer w0.254: C13.1@108.184,63.4 108.192,63.408 108.192,65.617 U1.71@108.2,65.625
VCAP_2: C14.1 U1.106 | length 2.9
  Top Layer w0.254: U1.106@110.625,84.05 111.75,84.05 112.2,84.5 112.874,84.5 C14.1@113.174,84.8
pads on no net: J1.11 J1.12 J1.13 J1.14 J2. J2.4 J2.10 J7. J7.1 J7.2 J7.9 J7.10 J7.11 U1.2 U1.7 U1.26 U1.27 U1.28 U1.29 U1.34 U1.47 U1.50 U1.56 U1.57 U1.60 U1.67 U1.69 U1.70 U1.73 U1.77 U1.78 U1.79 U1.80 U1.85 U1.86 U1.87 U1.88 U1.91 U1.92 U1.93 U1.96 U1.97 U1.98 U1.103 U1.104 U1.110 U1.111 U1.113 U1.114 U1.115 U1.116 U1.117 U1.118 U1.119 U1.129 U1.132 U1.134 U1.135 U1.136 U1.137 U1.139 U2.4 U2.5 U2.6 U4_U_IMU1.2 U4_U_IMU1.3 U4_U_IMU1.10 U4_U_IMU1.11 U4_U_IMU2.2 U4_U_IMU2.3 U4_U_IMU2.10 U4_U_IMU2.11 U4_U_IMU3.2 U4_U_IMU3.3 U4_U_IMU3.10 U4_U_IMU3.11 U4_U_IMU4.2 U4_U_IMU4.3 U4_U_IMU4.10 U4_U_IMU4.11 U8.8 U13.11

## Polygon pours and split planes (outlines as drawn)
GND on Bottom Layer "NONET_L-01_P-001" (solid, pour order 56): 128.5,103.6 128.8,103.3 128.8,102.3 128.5,102 125.6,102 125.3,102.3 125.3,103.3 125.6,103.6
5V_USB on Bottom Layer "5V_USB_L04_P017" (solid, pour order 17): 108.65,117.5 113.75,117.5 114.95,116.3 114.95,115 114.45,114.5 106.25,114.5 98.95,107.2 86.5,107.2 86.2,107.5 86.2,109.35 86.45,109.6 98.2,109.6 104.6,116 107.15,116
GND on Bottom Layer "GND_L04_P050" (solid, pour order 50): 96,83.25 96.5,82.75 96.5,78.75 96,78.25 90.25,78.25 89.75,78.75 89.75,82.75 90.25,83.25
3V3 on Bottom Layer "3V3_L04_P051" (solid, pour order 51): 87.75,100.25 128.25,100.25 129.75,98.75 129.75,60.25 127.75,58.25 75.5,58.25 73.5,60.25 73.5,66.75 85.75,79 85.75,98.25
3V3_Wireless on Bottom Layer "3V3_WIRELESS_L04_P049" (solid, pour order 49): 72.8,99.1 82.7,99.1 83.1,98.7 83.1,94.1 82.6,93.6 74.2,93.6 65.4,84.8 65.4,66.8 65,66.4 60,66.4 59.6,66.8 59.6,85.9
GND on Top Layer "NONET_L-01_P-001" (solid, pour order 55): 65.996,75.517 69.296,75.517 69.496,75.317 69.496,74.117 69.296,73.917 65.996,73.917
GND on Top Layer "NONET_L-01_P-001" (solid, pour order 53): 64.5,60 88.75,60 89.25,59.5 89.25,57.75 88.75,57.25 64.5,57.25 64,57.75 64,59.5
+BATT_PROTECT on Top Layer "+BATT_PROTECT_L01_P052" (solid, pour order 52): 67.7,117.2 68.9,118.4 70.5,118.4 70.5,113.7 70,113.2 65.4,113.2 64.9,113.7 64.9,117.2
BUCK_SW on Top Layer "BUCK_SW_L01_P046" (solid, pour order 46): 72.1,118.4 75.4,118.4 76.6,119.6 79.3,119.6 79.85,119.05 79.85,113.1 79.35,112.6 75.85,112.6 75.35,113.1 75.35,116.45 74,117.8 72.1,117.8
3V3_Wireless on Top Layer "3V3_WIRELESS_L01_P047" (solid, pour order 47): 61.9,78.1 62.3,78.5 65.2,78.5 65.6,78.1 65.6,72.7 65,72.1 62.9,72.1 61.9,73.1
+BATT on Top Layer "+BATT_L01_P045" (solid, pour order 45): 67.2,104.6 70.2,104.6 70.6,105 70.6,110.65 68.5,112.75 62.5,112.75 61.5,113.75 61.5,117.25 57.7,117.25 57.7,113.275 61.63,110 65.64,110 66.85,108.904 66.85,104.95
3V3 on Top Layer "3V3_L01_P037" (solid, pour order 37): 72.893,62.965 72.893,61.315 75.693,61.315 75.693,62.965
GND on Top Layer "GND_L01_P019" (solid, pour order 19): 130.8,80 130.5,79.7 127.9,79.7 127.6,80 127.6,84.2 127.9,84.5 130.5,84.5 130.8,84.2
3V3 on Top Layer "3V3_L01_P023" (solid, pour order 23): 124.8,80.6 123.1,80.6 122.9,80.4 122.9,78.8 123.1,78.6 124.8,78.6 125,78.8 125,80.4
GND on Top Layer "GND_L01_P018" (solid, pour order 18): 56.1,90.55 56.4,90.85 58.5,90.85 58.8,90.55 58.8,86.75 58.5,86.45 56.4,86.45 56.1,86.75
3V3 on Top Layer "3V3_L01_P027" (solid, pour order 27): 85.05,63.05 85.05,61.4 87.85,61.4 87.85,63.05
3V3 on Top Layer "3V3_L01_P020" (solid, pour order 20): 88.7,104.25 89.1,104.65 90.1,104.65 90.5,104.25 90.5,99.7 91.1,99.1 92.7,99.1 93.3,98.5 93.3,94.6 92.85,94.15 86.35,94.15 85.9,94.6 85.9,98.5 86.5,99.1 88.1,99.1 88.7,99.7
3V3_Wireless on Top Layer "3V3_WIRELESS_L01_P022" (solid, pour order 22): 77.95,104.25 78.35,104.65 79.35,104.65 79.75,104.25 79.75,99.7 80.35,99.1 81.95,99.1 82.55,98.5 82.55,94.6 82.1,94.15 75.6,94.15 75.15,94.6 75.15,98.5 75.75,99.1 77.35,99.1 77.95,99.7
5V_USB on Top Layer "5V_USB_L01_P016" (solid, pour order 16): 113.75,119.75 113.15,119.75 113.15,118.25 112.95,118.05 112.95,115.75 113.15,115.55 114.55,115.55 114.75,115.75 114.75,116.55 113.75,117.55
GND on Top Layer "GND_L01_P015" (solid, pour order 15): 113.95,119.85 113.95,117.75 115.15,116.55 116.05,116.55 116.25,116.75 116.25,117.55 116.05,117.75 115.45,117.75 115.25,117.95 114.55,118.65 114.55,119.85
GND on Top Layer "GND_L01_P011" (solid, pour order 11): 108.25,119.85 108.25,117.75 107.05,116.55 106.15,116.55 105.95,116.75 105.95,117.55 106.15,117.75 106.75,117.75 106.95,117.95 107.65,118.65 107.65,119.85
5V_USB on Top Layer "5V_USB_L01_P014" (solid, pour order 14): 108.45,119.75 109.05,119.75 109.05,118.25 109.25,118.05 109.25,115.75 109.05,115.55 107.65,115.55 107.45,115.75 107.45,116.55 108.45,117.55
5V on Top Layer "5V_L01_P009" (solid, pour order 9): 85.843,105.407 86.6,104.65 86.6,102.4 86.843,102.157 87.829,102.157 88.079,102.407 88.079,104.657 88.829,105.407
5V on Top Layer "5V_L01_P010" (solid, pour order 10): 95.35,113.65 97.35,113.65 97.85,113.15 97.85,109.15 93.85,105.15 77.85,105.15 77.1,104.4 77.1,102.9 76.85,102.65 75.85,102.65 75.6,102.9 75.6,105.4 76.85,106.65 92.1,106.65 93.85,108.4 93.85,112.15
GND on Top Layer "GND_L01_P008" (solid, pour order 8): 91.1,104.4 91.35,104.65 93.35,104.65 93.6,104.4 93.6,100.65 93.35,100.4 91.35,100.4 91.1,100.65
GND on Top Layer "GND_L01_P007" (solid, pour order 7): 80.35,104.4 80.6,104.65 82.6,104.65 82.85,104.4 82.85,100.65 82.6,100.4 80.6,100.4 80.35,100.65
5V_USB on Top Layer "5V_USB_L01_P006" (solid, pour order 6): 92.734,109.284 86.584,109.284 86.2,108.9 86.2,107.5 86.55,107.15 90.6,107.15 91.734,108.284 92.734,108.284
GND on Top Layer "GND_L01_P005" (solid, pour order 5): 94.1,122.65 94.6,123.15 97.85,123.15 98.35,122.65 98.35,117.15 97.85,116.65 94.6,116.65 94.1,117.15
5V_BUCK on Top Layer "5V_BUCK_L01_P004" (solid, pour order 4): 86.6,123.15 86.1,122.65 86.1,110.4 86.6,109.9 89.35,109.9 92.35,109.9 92.85,110.4 92.85,122.65 92.35,123.15
GND on Layer 2 (split plane): 388 vertices, not listed, extent 55.631,46.881 132.119,135.119
GND on Layer 1 (split plane): 388 vertices, not listed, extent 55.631,46.881 132.119,135.119

## Silkscreen, mask and mechanical layers (free items; w line width, h text height)
Top Overlay:
  text "5V-EXT" at 99.6,122.019 h2
  text "3V3" at 127.281,118.543 h2 r90
  text "GND" at 119.731,118 h2 r90
  text "STLINK-V2" at 130.681,117.55 h2 r90
  text "5V-USB" at 99.6,117.319 h2
  text "SWCLK" at 122.081,116.424 h2 r90
  text "SWDIO" at 124.681,116.372 h2 r90
  text "STLINK-V3" at 130.646,106.061 h2 r90
  text "BOOT0" at 96.106,101.217 h2
  text "EXT PWR: 9V - 6V6" at 57.006,99.433 h2
  text "TEST" at 122.55,99.069 h2
  text "DWM3000" at 57.073,92.278 h2
  text "NRST" at 122.263,92.069 h2
  text "3V3W" at 78.2,88.719 h2
  text "3V3" at 84.3,88.719 h2
  text "ESP8266 ESP-01" at 57,70.019 h2
  text "CS" at 80.181,64.195 h2 r90
  text "SCK" at 81.69,64.195 h2 r90
  text "MOSI" at 83.198,64.195 h2 r90
  text "MISO" at 84.706,64.195 h2 r90
  text "3V3" at 86.214,64.195 h2 r90
  text "GND" at 69.136,64.13 h2 r90
  text "RX" at 71.094,64.13 h2 r90
  text "TX" at 72.502,64.13 h2 r90
  text "3V3" at 73.936,64.13 h2 r90
  text "HYLO REV 1" at 114.55,58.587 h4
Bottom Overlay:
  text "MICRO SD" at 130.665,86.219 h2
Mechanical 1:
  lines w0.254: 55.25,107.5 55.25,110.5 ; 67.239,52.511 67.239,53.5 cw(c70.239,53.5) 70.25,56.5 117.5,56.5 cw(c117.511,53.5) 120.511,53.5 120.511,52.511 ; 67.239,129.489 67.239,128.5 ccw(c70.239,128.5) 70.25,125.5 117.5,125.5 ccw(c117.511,128.5) 120.511,128.5 120.511,129.489 ; 67.25,52.5 cw(c61.25,52.5) 55.25,52.5 55.25,74.5 55.25,129.5 cw(c61.25,129.5) 67.25,129.5 ; 120.5,52.5 ccw(c126.5,52.5) 132.5,52.5 ; 120.5,129.5 cw(c126.5,129.5) 132.5,129.5 132.5,79.75 132.5,52.25

## Text inside footprints (layer, text, board x,y; h text height)
U4_U_IMU1: Top Overlay "*" at 117.85,63.356 h1 r90; Mechanical 13 "*" at 119.235,64.624 h1 r90
U4_U_IMU2: Top Overlay "*" at 125.45,63.2 h1 r90; Mechanical 13 "*" at 126.835,64.624 h1 r90
U4_U_IMU3: Top Overlay "*" at 125.45,70.444 h1 r90; Mechanical 13 "*" at 126.835,71.868 h1 r90
U4_U_IMU4: Top Overlay "*" at 117.95,70.35 h1 r90; Mechanical 13 "*" at 119.249,71.868 h1 r90